# Altium PCB Temperature Sensor Card Digital.PcbDoc
Units mm, origin at the board's own origin, x right, y up, seen from the top; angles counter-clockwise.
Board outline 60 x 25 mm, 2 copper layers (Top Layer, Bottom Layer), stack 1.621 mm thick; 8 components, 16 nets, 89 pads, 27 vias.
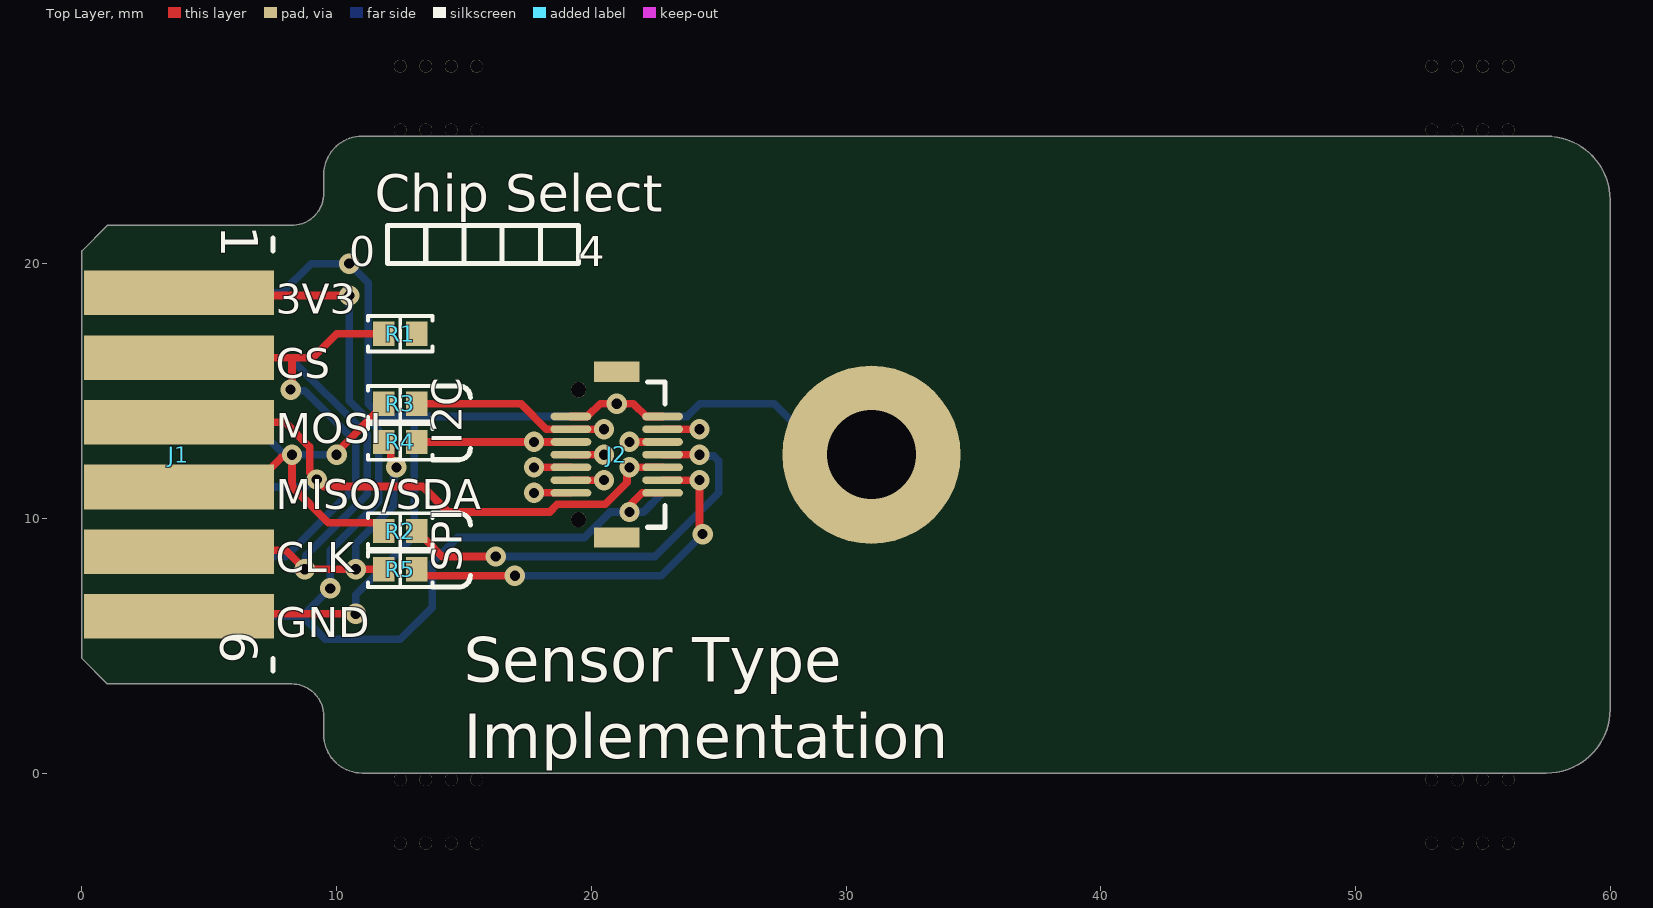
[diagram p0: Top Layer view]
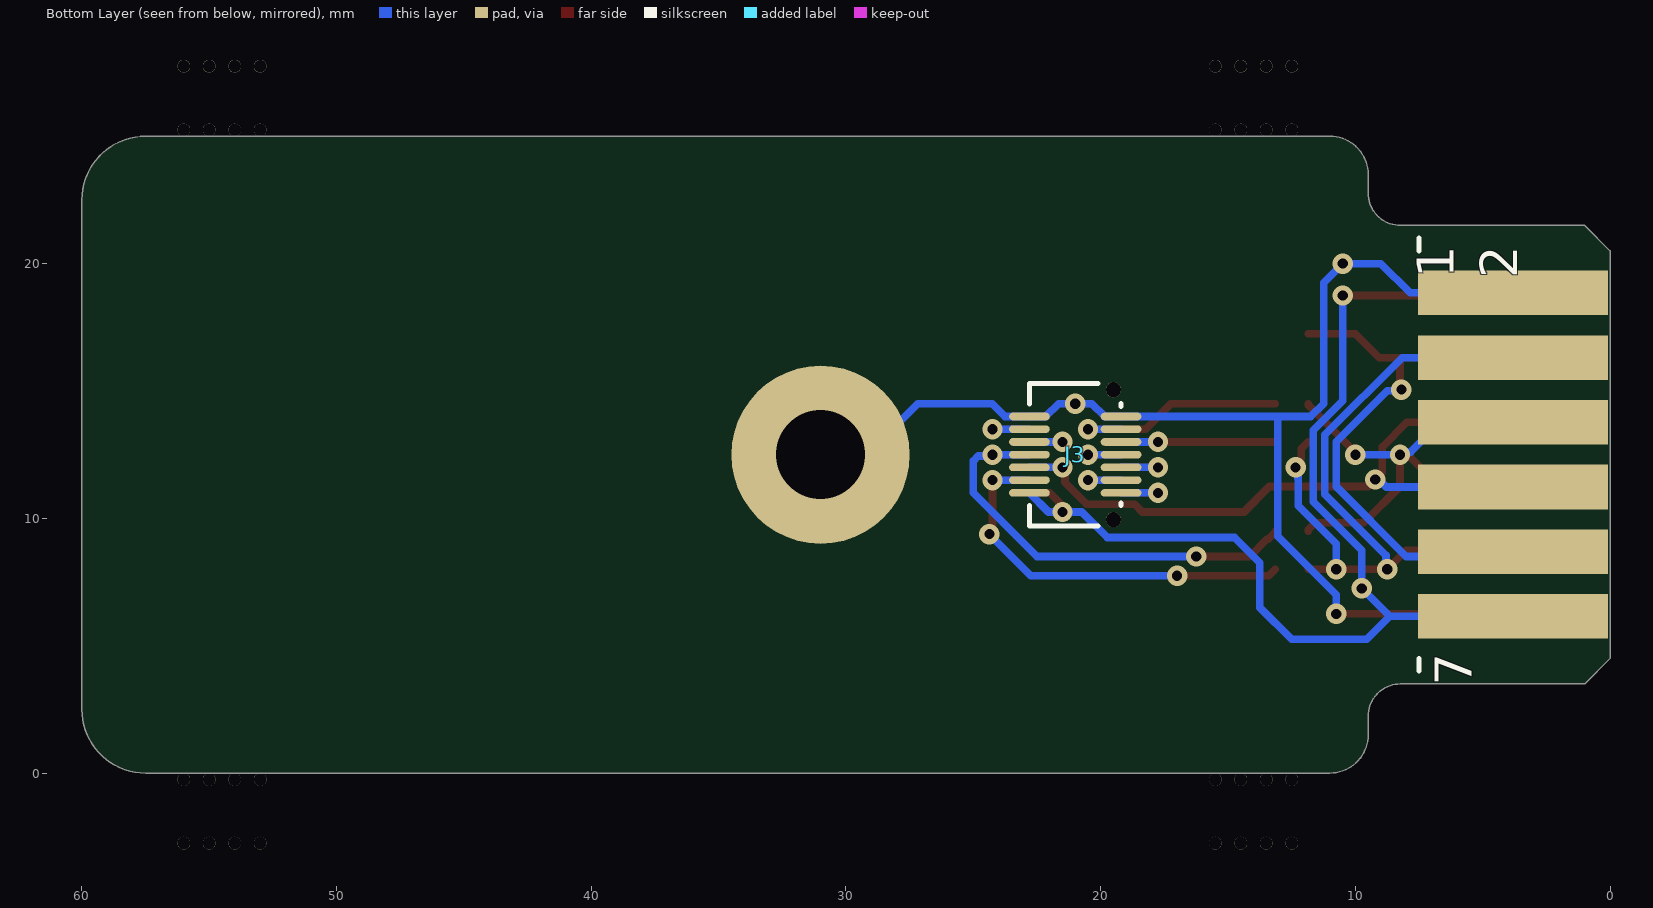
[diagram p1: Bottom Layer view, seen from below]
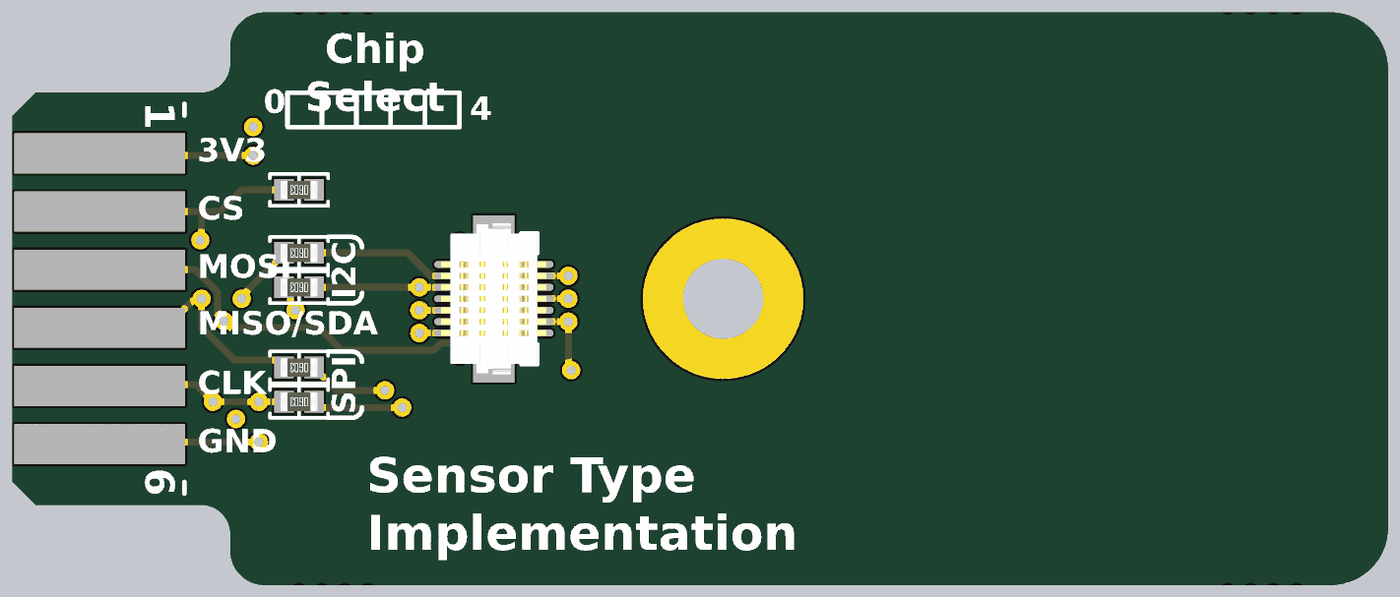
[diagram p2: 3D render of the assembled board from above, using the file's embedded part models]

## Layer stack, top to bottom
Top Solder: solder mask 0.0102, Solder Resist, Dk 3.5
Top Layer: signal copper 0.0356
Dielectric1: core 1.55, FR-4, Dk 4.8
Bottom Layer: signal copper 0.0356
Bottom Solder: solder mask 0.0102, Solder Resist, Dk 3.5

## Board outline
0,4.5 1,3.5 8.23,3.5 cw(c8.23,2.23) 9.5,2.23 9.5,1.5 ccw(c11,1.5) 11,0 57.5,0 ccw(c57.5,2.5) 60,2.5 60,22.5 ccw(c57.5,22.5) 57.5,25 11,25 ccw(c11,23.5) 9.5,23.5 9.5,22.77 cw(c8.23,22.77) 8.23,21.5 1,21.5 0,20.5

## Design rules (kind name [scope] priority, off if disabled: settings)
Clearance PadClearance [IsPad vs IsPad] p1: gap=0.15 ignorepadtopadclearanceinfootprint=FALSE
Clearance [All] p2: gap=0.15 ignorepadtopadclearanceinfootprint=FALSE
Height [All] p1: minheight=0 maxheight=2.9 prefheight=2.9
HoleSize [All] p1: absolutevalues=TRUE maxlimit=6 minlimit=0.4 maxpercent=80.000 minpercent=20.000
HoleToHoleClearance [All] p1: gap=0.2 allowstackedmicrovias=TRUE
MinimumSolderMaskSliver [All] p1: minsoldermaskwidth=0
PolygonConnect ViaConnect [IsVia] p1: connectstyle=Direct reliefconductorwidth=0.254 reliefentries=4 polygonreliefangle="90 Angle" airgapwidth=0.254
PolygonConnect [All] p2: connectstyle=Direct reliefconductorwidth=0.3 reliefentries=4 polygonreliefangle="90 Angle" airgapwidth=0.254
RoutingVias [All] p1: holewidth=0.6 width=1 viastyle="Through Hole" minholewidth=0.4 minwidth=0.8 maxholewidth=5 maxwidth=6
SilkToSilkClearance [All] p1: silktosilkclearance=0
SilkToSolderMaskClearance SilkscreenOverComponentPads [IsPad] p1: minsilkscreentomaskgap=0.05 clearancetoexposedcopper=TRUE
SolderMaskExpansion "Via Tenting" [IsVia] p1: expansion=-2 istentingtop=FALSE
SolderMaskExpansion [All] p2: expansion=0.102 istentingtop=FALSE
Width [All] p1: maxlimit=2 minlimit=0.2 preferedwidth=0.4
24 further rules are at their usual default settings.

## Components (designator, comment, footprint, x,y, rotation, side; value= is the part's Value field where it differs from the comment)
J1 "12 Pin Dual Row" "TE 5650118-3 Card Edge" 0,12.5 r270 top
J2 "DF12(3.0)-14DP-0.5V(86)" "HIROSE DF12 3.0-14DP-0.5V 86" 21,12.5 r90 top
J3 "DF12A(3.0)-14DS-0.5V(81)" "HIROSE DF12A 3.0-14DS-0.5V 81" 21,12.5 r270 bottom
R1 "0 Ohms" "RES 0603_1608" 12.5,17.25 r180 top
R2 "0 Ohms" "RES 0603_1608" 12.5,9.5 r180 top
R3 "0 Ohms" "RES 0603_1608" 12.5,14.5 r180 top
R4 "0 Ohms" "RES 0603_1608" 12.5,13 r180 top
R5 "0 Ohms" "RES 0603_1608" 12.5,8 r180 top

## Footprints (in the part's own frame and the unit in brackets; to place one, negate y for a bottom-side part, rotate by r counter-clockwise, add the part's x,y. Pads: shape width x height; smd on the part's side, far side on the other; paste and mask are expansions set on the pad)
"HIROSE DF12 3.0-14DP-0.5V 86" [mm] "14 Position Connector Header, 0.50mm Pitch,5.7x3.8mm Body"
  oval 0.3x1.6 smd: 1(-1.5,-1.8) 2(-1,-1.8) 3(-0.5,-1.8) 4(0,-1.8) 5(0.5,-1.8) 6(1,-1.8) 7(1.5,-1.8) 8(1.5,1.8) 9(1,1.8) 10(0.5,1.8) 11(0,1.8) 12(-0.5,1.8) 13(-1,1.8) 14(-1.5,1.8)
  round 0.6 hole 0.6 unplated: B(-2.55,1.5) B(2.55,1.5)
  rect 0.8x1.8 smd: M(-3.25,0) M(3.25,0)
  silkscreen extent -2.85,-1.9 2.85,-1.2, body extent -3.3,-2.3 3.3,2.3, height 2.3
"HIROSE DF12A 3.0-14DS-0.5V 81" [mm] "14 Position Connector Receptacle, 0.50mm Pitch,5.60x3.60mm Body"
  oval 0.3x1.6 smd: 1(1.5,-1.8) 2(1,-1.8) 3(0.5,-1.8) 4(0,-1.8) 5(-0.5,-1.8) 6(-1,-1.8) 7(-1.5,-1.8) 8(-1.5,1.8) 9(-1,1.8) 10(-0.5,1.8) 11(0,1.8) 12(0.5,1.8) 13(1,1.8) 14(1.5,1.8)
  round 0.6 hole 0.6 unplated: B(-2.55,1.5) B(2.55,1.5)
  silkscreen extent -2.8,-1.8 2.8,1.8, body extent -2.8,-2.3 2.8,2.3, height 2.2
"RES 0603_1608" [mm] "Chip Resistor, 2-Leads, Body 1.60x0.80mm, IPC Medium Density"
  rect 0.85x0.95 smd: 1(-0.65,0) 2(0.65,0)
  silkscreen extent -1.27,-0.7 1.27,0.7, body extent -0.8,-0.4 0.8,0.4, height 0.45
"TE 5650118-3 Card Edge" [mm] "Card Edge contacts for TE Connector"
  rect 1.75x7.46 smd: 1(-6.35,3.81) 2(-3.81,3.81) 3(-1.27,3.81) 4(1.27,3.81) 5(3.81,3.81) 6(6.35,3.81)
  rect 1.75x7.46 smd far side: 7(6.35,3.81) 8(3.81,3.81) 9(1.27,3.81) 10(-1.27,3.81) 11(-3.81,3.81) 12(-6.35,3.81)
  silkscreen extent -8.5,7.5 8.5,7.5

## Part data
J2: "CONN HDR 14POS SMD GOLD", Manufacturer="Hirose Electric Co Ltd", Supplier Part Number 1=H11701CT-ND, ComponentLink1Description=Datasheet, ComponentLink1URL=https://www.hirose.com/product/download/?distributor=digikey&type=specSheet&lang=en&num=DF12(3.0)-14DP-0.5V(86), ComponentLink2Description="DigiKey Link", ComponentLink2URL=http://digikey.com/product-detail/en/hirose-electric-co-ltd/DF12-3.0-14DP-0.5V-86/H11701CT-ND/2172493, Connector Type="Header, Outer Shroud Contacts", Contact Finish=Gold, Contact Finish Thickness="8.00µin (0.203µm)", Features="Board Guide, Solder Retention", Height Above Board="0.091\" (2.30mm)", LastUpdated="06/08/2020 22:47:47", Lifecycle Status=Active, Mated Stacking Heights=3mm, Minimum Order=1, Mounting Type="Surface Mount", Number of Positions=14, Number of Rows=2, Packaging=TapeAndReel, Part Number=DF12(3.0)-14DP-0.5V(86), Part Status=Active, Pitch="0.020\" (0.50mm)", Price=0.38, Series=DF12, Supplier 1=DigiKey
J3: "CONN RCPT 14POS SMD GOLD", Manufacturer="Hirose Electric Co Ltd", Supplier Part Number 1=H11713CT-ND, ComponentLink1Description=Datasheet, ComponentLink1URL=https://www.hirose.com/product/document?clcode=CL0537-0721-0-86&productname=DF12(3.0)-10DP-0.5V(86)&series=DF12&documenttype=Catalog&lang=en&documentid=D31693_en, ComponentLink2Description="DigiKey Link", ComponentLink2URL=http://digikey.com/product-detail/en/hirose-electric-co-ltd/DF12A-3.0-14DS-0.5V-81/H11713CT-ND/2172505, Connector Type="Receptacle, Center Strip Contacts", Contact Finish=Gold, Contact Finish Thickness="8.00µin (0.203µm)", Features="Board Guide", Height Above Board="0.087\" (2.20mm)", LastUpdated="06/08/2020 22:48:47", Lifecycle Status=Active, Mated Stacking Heights=3mm, Minimum Order=1, Mounting Type="Surface Mount", Number of Positions=14, Number of Rows=2, Packaging=TapeAndReel, Part Number=DF12A(3.0)-14DS-0.5V(81), Part Status=Active, Pitch="0.020\" (0.50mm)", Price=0.36, Series=DF12, Supplier 1=DigiKey
R1 R2 R3 R4 R5: library part ERJ-3GEY0R00V, "RES SMD 0 OHM JUMPER 1/10W 0603", Device Package="0603 (1608 Metric)", Manufacturer="Panasonic Electronic Components", Operating Temperature="-55°C ~ 155°C", Power (Watts)="0.1W, 1/10W", Ratings=AEC-Q200, Supplier Device Package=0603, Supplier Part Number 1=P0.0GCT-ND, Tolerance=Jumper, ComponentLink1Description=Datasheet, ComponentLink1URL=http://industrial.panasonic.com/www-cgi/jvcr13pz.cgi?E+PZ+3+AOA0001+ERJ3GEY0R00V+7+WW, ComponentLink2Description="DigiKey Link", ComponentLink2URL=http://digikey.com/product-detail/en/panasonic-electronic-components/ERJ-3GEY0R00V/P0.0GCT-ND/134711, Composition="Thick Film", Features="Automotive AEC-Q200", Height - Seated (Max)="0.022\" (0.55mm)", LastUpdated="13/08/2020 10:36:40", Lifecycle Status=Active, Minimum Order=1, Number of Terminations=2, Package / Case="0603 (1608 Metric)", Packaging=CutTape, Part Number=ERJ-3GEY0R00V, Part Status=Active, PartId=22603, Price=0.10, Resistance="0 Ohms", Series=ERJ, Size / Dimension="0.063\" L x 0.031\" W (1.60mm x 0.80mm)", Supplier 1=DigiKey

## Free pads (board coordinates)
  round 7 hole 3.5: M(31,12.5)
  round 0.5 hole 0.5 unplated: N(12.5,-2.75) N(12.5,-0.25) N(12.5,25.25) N(12.5,27.75) N(13.5,-2.75) N(13.5,-0.25) N(13.5,25.25) N(13.5,27.75) N(14.5,-2.75) N(14.5,-0.25) N(14.5,25.25) N(14.5,27.75) N(15.5,-2.75) N(15.5,-0.25) N(15.5,25.25) N(15.5,27.75) N(53,-2.75) N(53,-0.25) N(53,25.25) N(53,27.75) N(54,-2.75) N(54,-0.25) N(54,25.25) N(54,27.75) N(55,-2.75) N(55,-0.25) N(55,25.25) N(55,27.75) N(56,-2.75) N(56,-0.25) N(56,25.25) N(56,27.75)

## Via types
v1: diameter 0.8, hole 0.4, Top Layer to Bottom Layer, 27 vias

## Nets (pads, with @x,y where several pads share a name; then routed paths per layer and width w, separated by ;. In a path a pad name is that pad's centre, name@x,y a point inside that pad or via, vN(x,y) a via of type N, cw(c..) or ccw(c..) an arc to the next point about the centre after c; other vN are vias at no path point)
3V3: J1.1 J1.7 J2.1 J3.1 | length 45.6
  Top Layer w0.3: J1.1 3.91,18.75 v1(10.5,18.75) ; v1(21.5,10.25) 21.596,10.346 21.596,10.596 22,11 J2.1
  Bottom Layer w0.3: J1.7 8.65,6.15 ; v1(10.5,18.75) 10.5,14.614 11.65,13.464 11.65,10.65 9.75,8.75 v1(9.75,7.25) 8.65,6.15 ; J3.1 22.05,10.25 v1(21.5,10.25) 20.75,10.25 19.75,9.25 14.75,9.25 13.75,8.25 13.75,6.5 12.5,5.25 9.55,5.25 8.65,6.15
5V: J2.14 J3.14 | length 2.7
  Top Layer w0.3: v1(17.75,11) J2.14
  Bottom Layer w0.3: v1@18,11 J3.14
CS: J1.2 J1.8 R1.2 | length 23
  Top Layer w0.3: J1.2 8.25,16.31 ; v1(8.194,15.056) 8.25,15.111 8.25,16.31 ; R1.2 10,17.25 9.06,16.31 8.25,16.31
  Bottom Layer w0.3: J1.8 4,8.5 8,8.5 10.75,11.25 10.75,13 8.745,15.005 8.245,15.005 v1(8.194,15.056)
CS0: J2.5 J3.5 | length 2.6
  Top Layer w0.3: v1(21.5,13) J2.5
  Bottom Layer w0.3: v1(21.5,13) J3.5
CS1: J2.6 J3.6 | length 2.9
  Top Layer w0.3: J2.6 v1(24.25,13.5)
  Bottom Layer w0.3: J3.6 v1(24.25,13.5)
CS2: J2.13 J3.13 | length 2.6
  Top Layer w0.3: J2.13 v1(20.5,11.5)
  Bottom Layer w0.3: J3.13 v1(20.5,11.5)
CS3: J2.12 J3.12 | length 2.9
  Top Layer w0.3: v1(17.75,12) J2.12
  Bottom Layer w0.3: v1(17.75,12) J3.12
CS4: J2.11 J3.11 | length 2.6
  Top Layer w0.3: J2.11 v1(20.5,12.5)
  Bottom Layer w0.3: J3.11 v1(20.5,12.5)
DCLK: J1.5 J1.11 R4.2 R5.2 | length 29.2
  Top Layer w0.3: J1.5 3.87,8.75 8,8.75 v1(8.75,8) v1(10.75,8) R5.2 ; R4.2 12.125,12.725 12.125,12.36 12.35,12.135 v1(12.35,12)
  Bottom Layer w0.3: J1.11 8.167,16.31 11.2,13.277 11.2,10.95 8.801,8.551 8.801,8.051 v1(8.75,8) ; v1(10.75,8) 10.75,9 12.25,10.5 12.25,11.574 12.254,11.579 12.254,11.904 v1(12.35,12)
DD: J1.4 J1.10 R2.2 R3.2 | length 19.6
  Top Layer w0.3: J1.4 6.665,11.23 7.839,12.404 ; v1(8.25,12.5) 8.25,11.25 9.675,9.825 11.575,9.825 11.85,9.55 R2.2 ; v1(10,12.5) 10,12.6 11.85,14.45 R3.2
  Bottom Layer w0.3: J1.10 6.665,13.77 7.839,12.596 8.154,12.596 v1(8.25,12.5) v1(10,12.5)
GND: J1.6 J1.12 J2.7 J2.8 J3.7 J3.8 pad.M | length 54.1
  Top Layer w0.3: J1.6 3.91,6.25 v1(10.75,6.25) ; J2.8 19.85,14 20.35,14.5 v1(21,14.5) 21.65,14.5 22.15,14 J2.7
  Bottom Layer w0.3: J1.12 7.85,18.85 9,20 v1(10.5,20) 11.25,19.25 11.25,14.5 11.75,14 13,14 ; v1(10.75,6.25) 10.75,7 13.05,9.3 13.05,13.95 13,14 ; pad.M 29.187,12.5 27.187,14.5 24.26,14.5 23.76,14 J3.7 22.15,14 21.65,14.5 v1(21,14.5) 20.35,14.5 19.85,14 J3.8 13,14
I2C_SCL: J2.10 J3.10 R4.1 | length 7.5
  Top Layer w0.3: R4.1 v1(17.75,13) J2.10
  Bottom Layer w0.3: v1(17.75,13) J3.10
I2C_SDA: J2.9 J3.9 R3.1 | length 9.1
  Top Layer w0.3: R3.1 17.24,14.5 18.24,13.5 J2.9 v1(20.5,13.5)
  Bottom Layer w0.3: J3.9 v1(20.5,13.5)
MISO: J2.4 J3.4 R2.1 | length 18.3
  Top Layer w0.3: R2.1 13.15,9.45 13.425,9.175 13.475,9.175 14.15,8.5 v1(16.25,8.5) ; J2.4 v1(24.25,12.5)
  Bottom Layer w0.3: v1(16.25,8.5) 22.5,8.5 25,11 25,12.25 24.801,12.449 24.301,12.449 v1(24.25,12.5) J3.4
MOSI: J1.3 J1.9 J2.3 J3.3 | length 28.9
  Top Layer w0.3: J1.3 7.98,13.77 8.95,12.8 8.95,11.8 v1(9.225,11.525) 9.5,11.25 13.375,11.25 14.375,10.25 18.37,10.25 18.67,10.55 20.54,10.55 21.404,11.414 21.404,11.904 v1(21.5,12) J2.3
  Bottom Layer w0.3: J1.9 8.795,11.23 9.09,11.525 v1(9.225,11.525) ; v1(21.5,12) J3.3
SCLK: J2.2 J3.2 R5.1 | length 17.1
  Top Layer w0.3: R5.1 13.4,7.75 v1(17,7.75) ; J2.2 v1(24.25,11.5) 24.25,9.5 v1(24.37,9.38)
  Bottom Layer w0.3: v1(17,7.75) 22.74,7.75 v1(24.37,9.38) ; J3.2 v1(24.25,11.5)
pads on no net: J2.B J2.M J3.B R1.1

## Silkscreen, mask and mechanical layers (free items; w line width, h text height)
Top Overlay:
  lines w0.2: 13.77,7.3 14.8,7.3 ccw(c14.8,7.75) 15.25,7.75 ; 13.77,10.2 14.8,10.2 cw(c14.8,9.75) 15.25,9.75 ; 13.77,12.3 14.8,12.3 ccw(c14.8,12.75) 15.25,12.75 ; 13.77,15.2 14.8,15.2 cw(c14.8,14.75) 15.25,14.75 ; 13.5,20 15,20 ; 13.5,20 12,20 12,21.5 13.5,21.5 ; 13.5,20 13.5,21.5 ; 13.5,21.5 15,21.5 ; 15,20 16.5,20 ; 15,20 15,21.5 ; 15,21.5 16.5,21.5 ; 16.5,20 18,20 ; 16.5,20 16.5,21.5 ; 16.5,21.5 18,21.5 ; 18,20 19.5,20 19.5,21.5 18,21.5 ; 18,20 18,21.5
  text "Chip Select" at 11.5,21.546 h2.5
  text "0" at 10.5,19.5 h2
  text "4" at 19.5,19.5 h2
  text "3V3" at 7.62,17.647 h2
  text "CS" at 7.62,15.104 h2
  text "I2C" at 15.302,12.907 h2 r90
  text "MOSI" at 7.62,12.564 h2
  text "MISO/SDA" at 7.62,9.959 h2
  text "SPI" at 15.297,7.907 h2 r90
  text "CLK" at 7.62,7.485 h2
  text "GND" at 7.62,4.945 h2
  text "Sensor Type / Implementation" at 15,0 h3
Bottom Overlay:
  text "Analog Temperature Sensor Card" at 38,0 h5
Outlines:
  the board outline again, w0.2
Route Tool Path:
  lines w3: 11,-1.5 cw(c11,1.5) 8,1.5 8,2 1,2 ; 11,26.5 ccw(c11,23.5) 8,23.5 8,23 1,23 ; 17,-1.5 51.5,-1.5 ; 17,26.5 51.5,26.5 ; 55,5 48.5,5 48.5,20 55,20 ; 57.5,-1.5 ccw(c57.5,2.5) 61.5,2.5 61.5,22.5 ccw(c57.5,22.5) 57.5,26.5 ; -1.5,4.5 ccw(c0,4.5) -1.061,3.439 ; -1.5,4.5 ccw(c0,4.5) -1.061,3.439 ; -1.5,4.5 -1.5,20.5 ; -1.5,20.5 cw(c0,20.5) -1.061,21.561 ; -1.5,20.5 cw(c0,20.5) -1.061,21.561 ; -1.061,3.439 -0.061,2.439 ; -1.061,21.561 -0.061,22.561 ; -0.061,2.439 ccw(c1,3.5) 1,2 ; -0.061,2.439 ccw(c1,3.5) 1,2 ; -0.061,22.561 cw(c1,21.5) 1,23 ; -0.061,22.561 cw(c1,21.5) 1,23

## Text inside footprints (layer, text, board x,y; h text height)
J1: Top Overlay "6" at 4.936,5.576 h2.5 r270; Top Overlay "1" at 4.991,21.498 h2.5 r270; Bottom Overlay "1 / 2" at 3.155,19.424 h2.5 r270; Bottom Overlay "7" at 4.936,3.424 h2.5 r270